# Altium PCB IMU_Board.PcbDoc
Units mm, origin at the board's own origin, x right, y up, seen from the top; angles counter-clockwise.
Board outline 50 x 50 mm, 2 copper layers (Top Layer, Bottom Layer); 25 components, 37 nets, 125 pads, 48 vias.
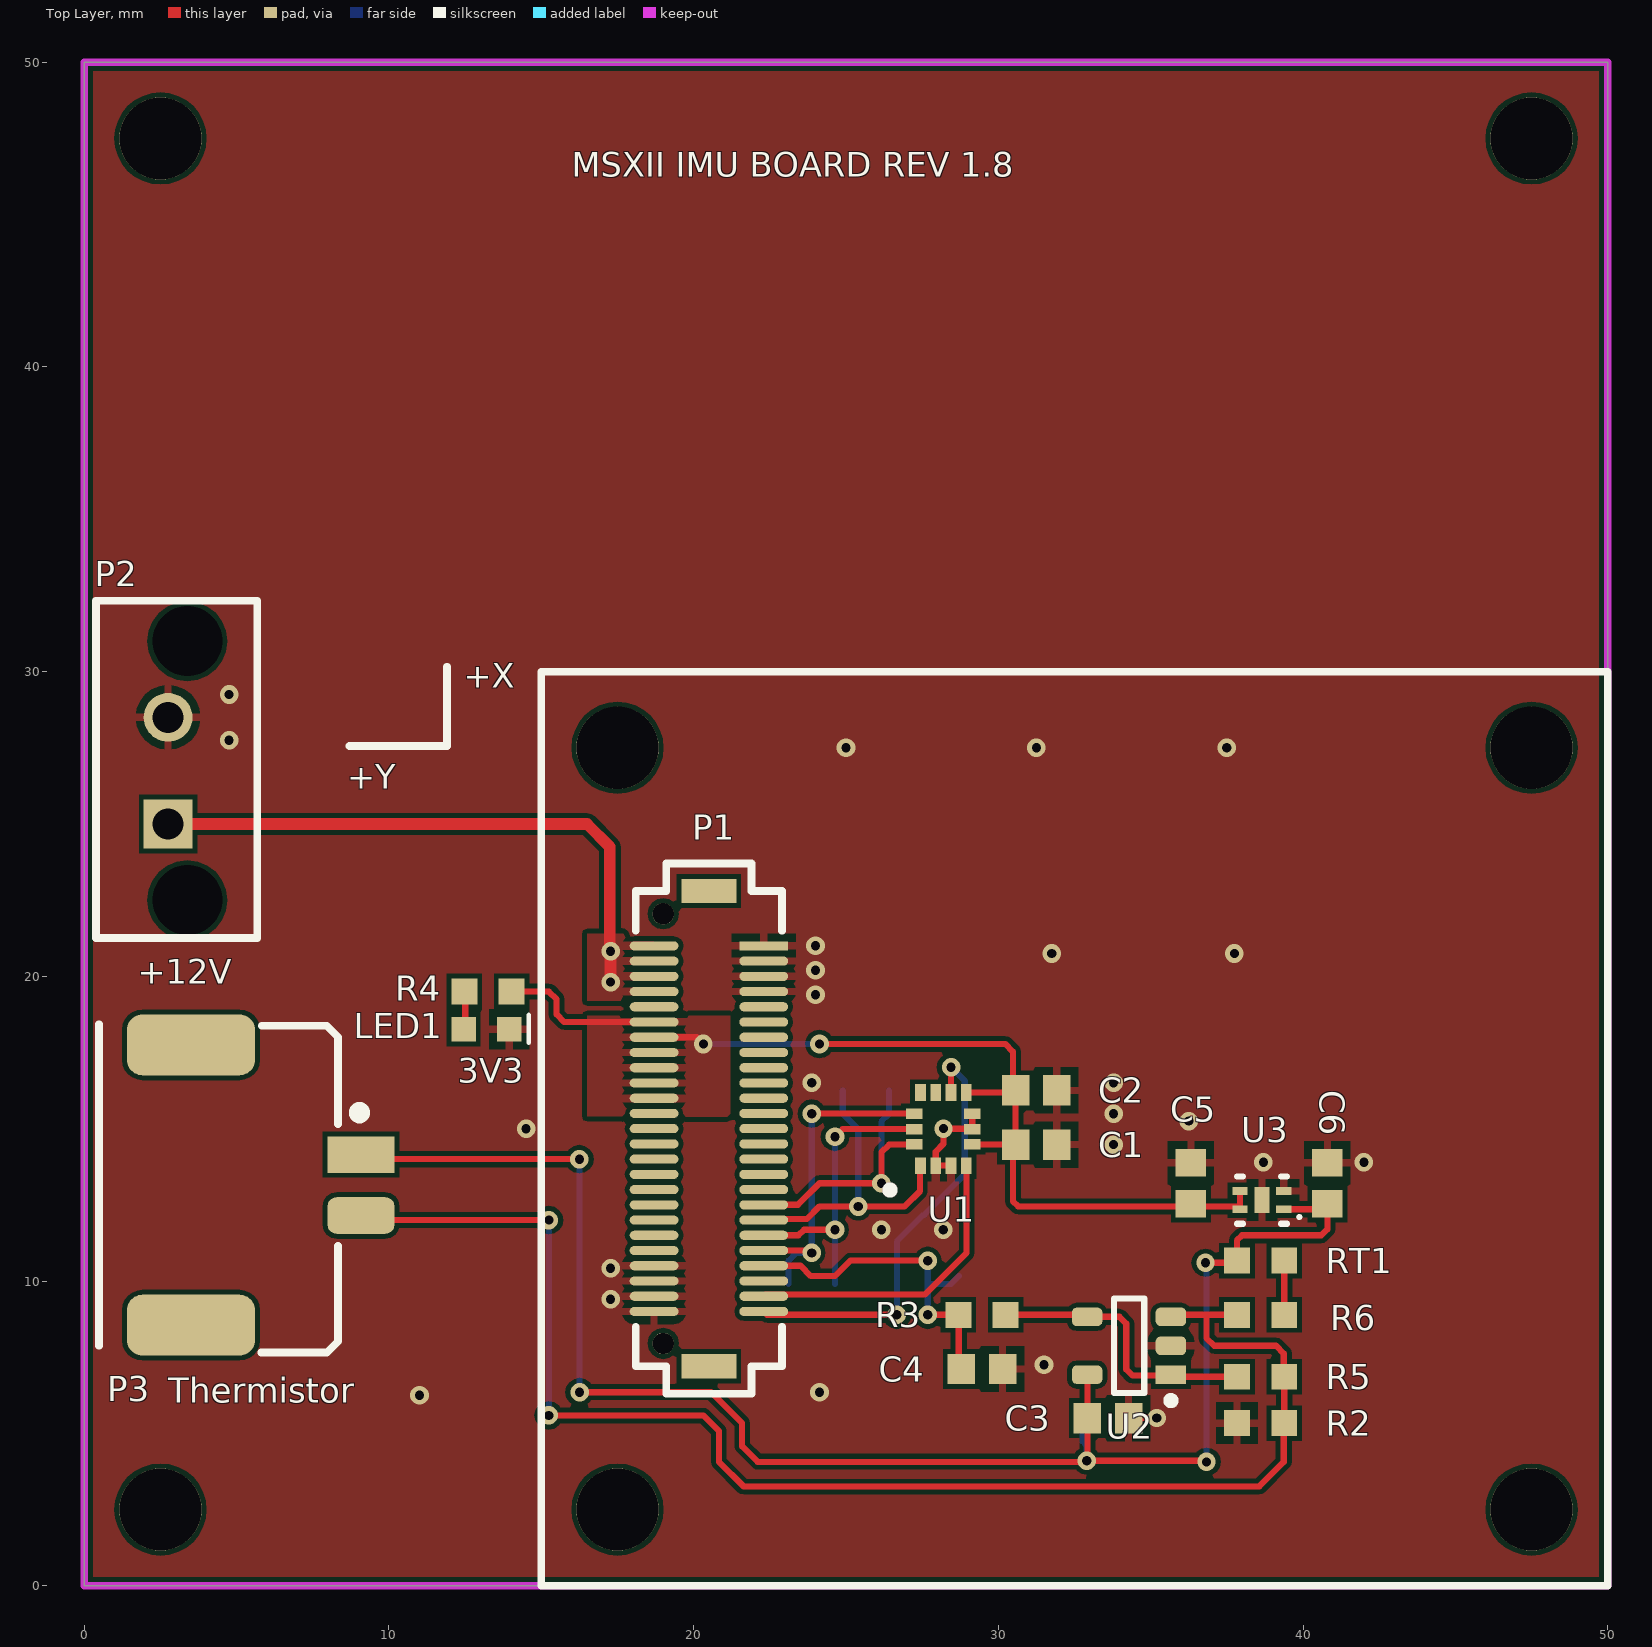
[diagram p0: Top Layer view]
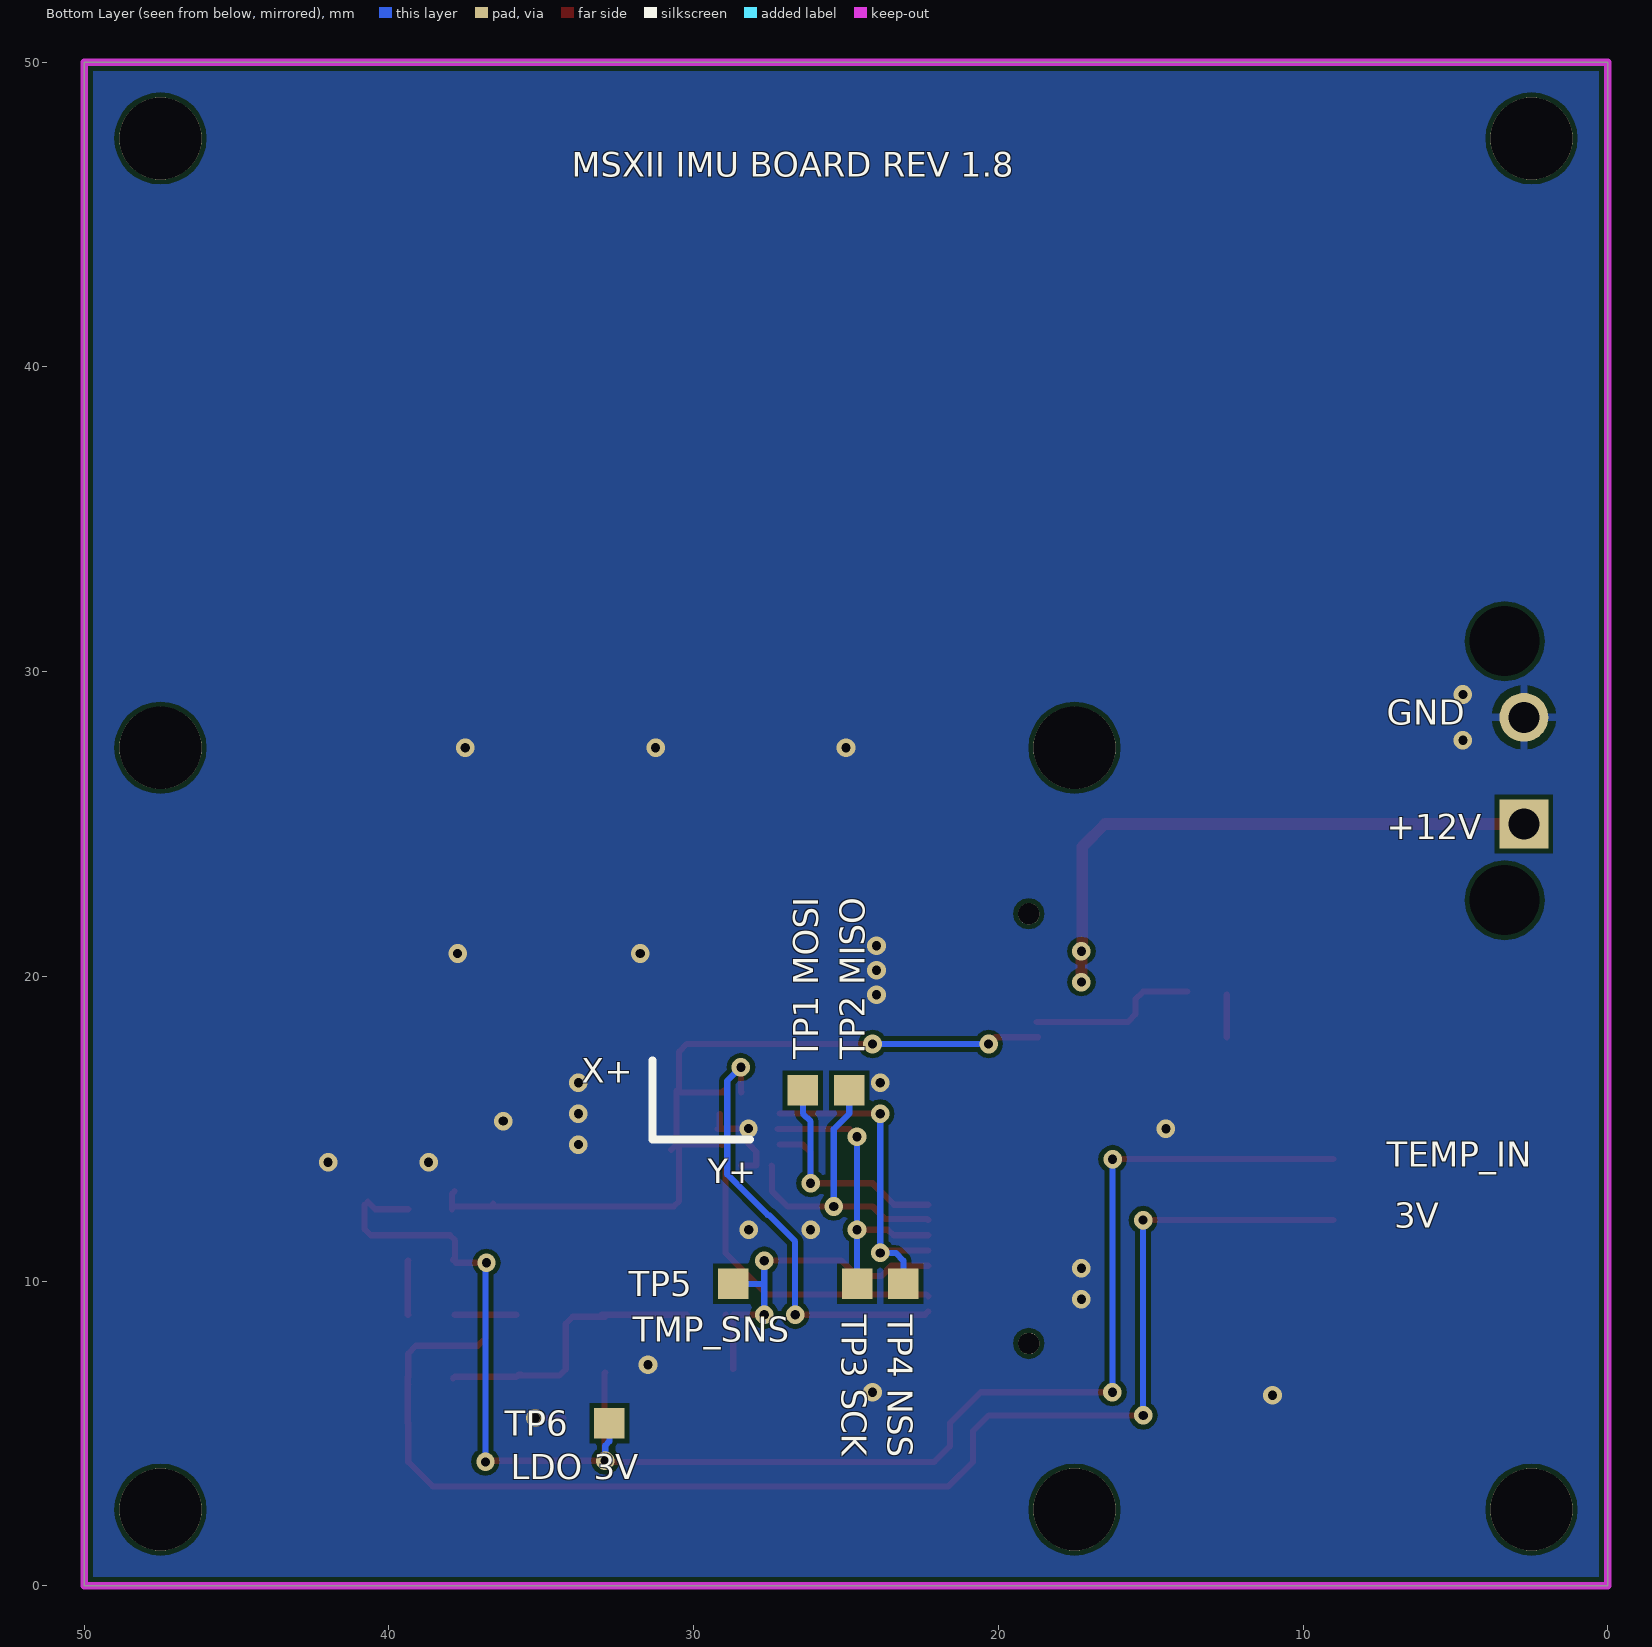
[diagram p1: Bottom Layer view, seen from below]
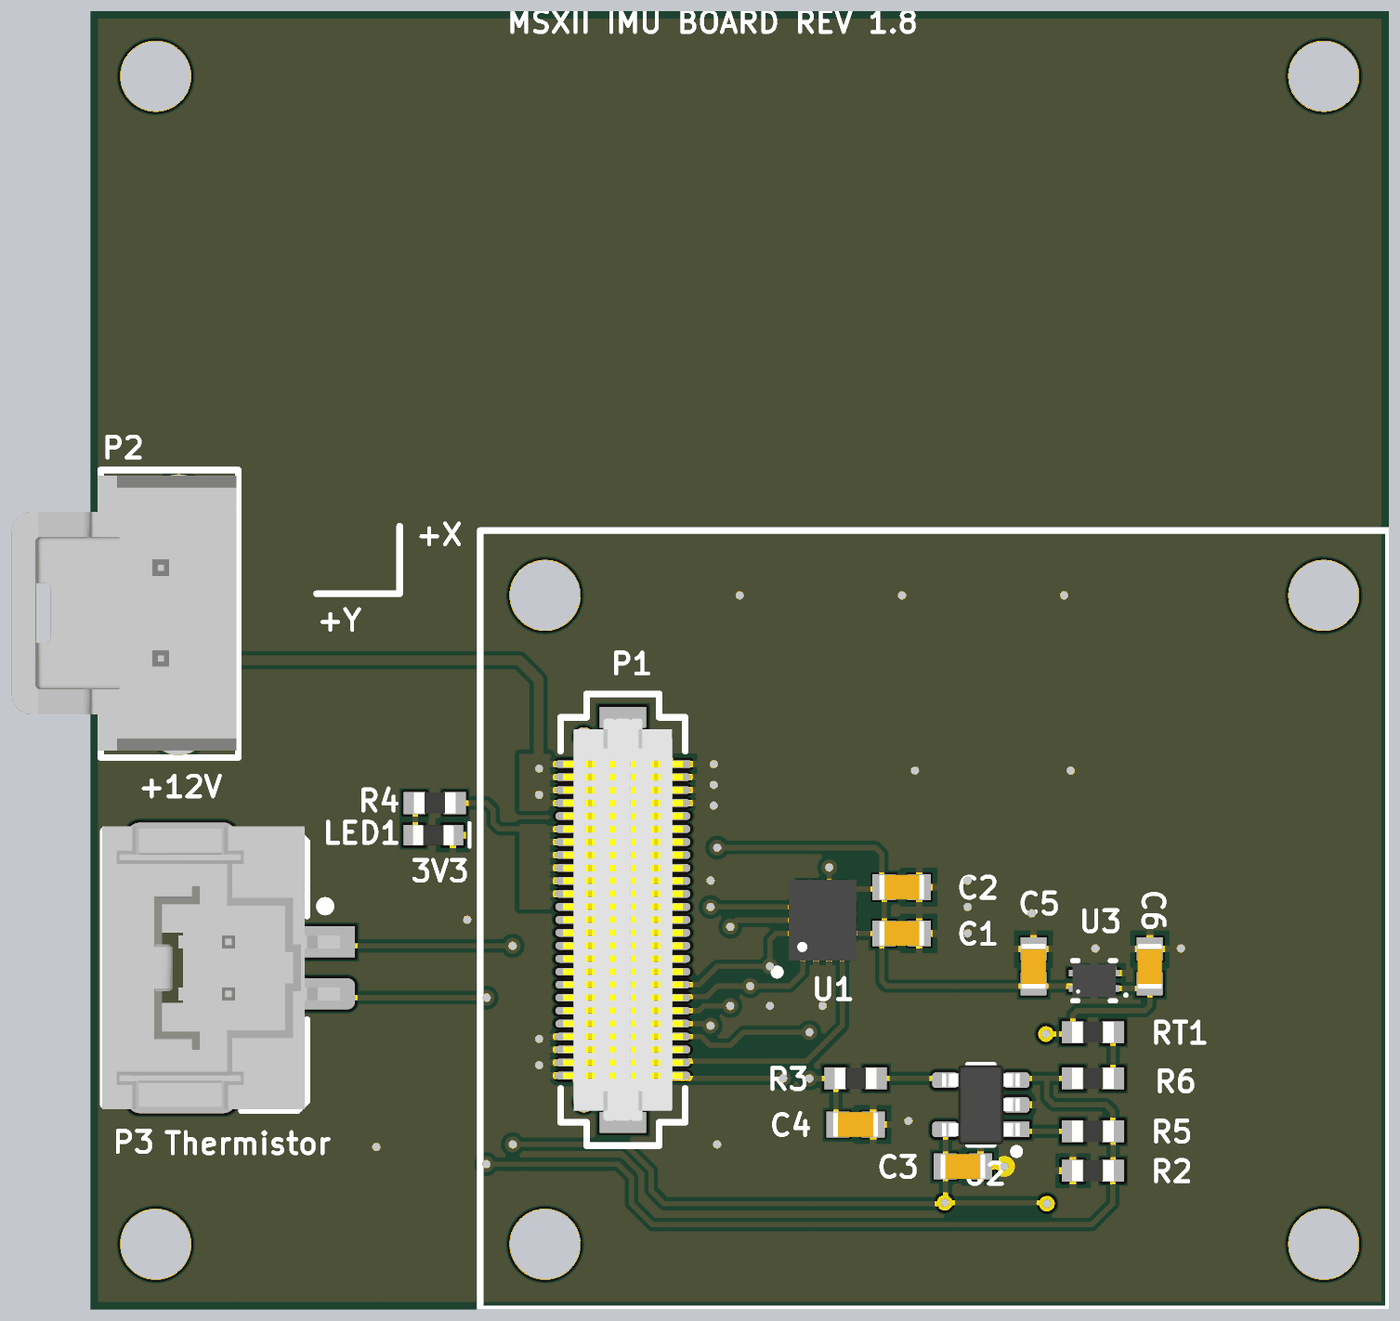
[diagram p2: 3D render of the assembled board from above, using the file's embedded part models]

## Layer stack, top to bottom
Top Solder: solder mask 0.0102, Solder Resist, Dk 3.5
Top Layer: signal copper 0.0356
Dielectric 1: dielectric 0.32, FR-4, Dk 4.8
Bottom Layer: signal copper 0.0356
Bottom Solder: solder mask 0.0102, Solder Resist, Dk 3.5

## Board outline
0,0 0,50 50,50 50,0

## Design rules (kind name [scope] priority, off if disabled: settings)
Clearance [All] p1: gap=0.152 ignorepadtopadclearanceinfootprint=TRUE except(0: Arc-Hole Track-Hole SMDPad-Hole THPad-Hole Via-Hole Fill-Hole Poly-Hole Region-Hole Text-Hole)
ComponentClearance ComponentClearance_ControllerBoard [InComponent('P1') vs Identifier = 'Controller-Board'] p1: gap=0 collisioncheckmode=3 verticalgap=0 showdistances=FALSE
ComponentClearance ComponentClearance_Standoffs [Identifier = 'Standoff' vs Identifier = 'Controller-Board'] p2: gap=0 collisioncheckmode=3 verticalgap=0 showdistances=FALSE
ComponentClearance [All] p3: gap=0.254 collisioncheckmode=3 verticalgap=0.254 showdistances=FALSE
HoleSize [All] p1: absolutevalues=TRUE maxlimit=6.3 minlimit=0.3 maxpercent=80.000 minpercent=20.000
MinimumAnnularRing [All] p1: minimumring=0.152
MinimumSolderMaskSliver [All] p1: minsoldermaskwidth=0.3
PolygonConnect [IsPad] p1: connectstyle=Relief reliefconductorwidth=0.254 reliefentries=4 polygonreliefangle="90 Angle" airgapwidth=0.254
PolygonConnect PolygonConnect_NoThermal [Not(IsPad)] p2: connectstyle=Direct reliefconductorwidth=0.254 reliefentries=4 polygonreliefangle="90 Angle" airgapwidth=0.254
RoutingVias [All] p1: holewidth=0.3 width=0.6 viastyle="Through Hole" minholewidth=0.3 minwidth=0.6 maxholewidth=0.711 maxwidth=1.27
SilkToSolderMaskClearance [IsPad] p1: minsilkscreentomaskgap=0.178 clearancetoexposedcopper=TRUE
SolderMaskExpansion [All] p1: expansion=0.102
Width [All] p1: maxlimit=2.54 minlimit=0.152 preferedwidth=0.203
26 further rules are at their usual default settings.

## Classes and differential pairs
component class Controller_Board_Interface: P1

## Components (designator, comment, footprint, x,y, rotation, side; value= is the part's Value field where it differs from the comment)
C1 "CAP CER 0.1UF 50V 10% X7R 0603" "CAP, 0603" 31.242,14.478 r0 top
C2 "CAP CER 0.1UF 50V 10% X7R 0603" "CAP, 0603" 31.242,16.256 r0 top
C3 "CAP CER 0.1UF 50V 10% X7R 0603" "CAP, 0603" 33.6,5.5 r0 top
C4 "CAP CER 10nF 50V 5% X7R 0603" "CAP, 0603" 29.464,7.112 r0 top
C5 "CAP CER 1UF 50V 10% X7R 0603" "CAP, 0603" 36.322,13.208 r90 top
C6 "CAP CER 1UF 50V 10% X7R 0603" "CAP, 0603" 40.8,13.208 r90 top
LED1 "LED GREEN CLEAR 2V 0603" LED_0603 12.5,18.25 r0 top
P1 "CONN 50POS Bergstak Plug 0.02\"" "CONN, BERGSTAK 50 POS PLUG" 20.5,15 r0 top locked
P2 "CONN 2POS ULTRA-FIT 0.138\"" "CONN, 2POS ULTRA-FIT" 2.75,25 r90 top
P3 "Dura-Clik" "CONN, 2POS Dura-Click Vertical" 9.08,14.15 r270 top
R2 "RES 10K OHM 1% 1/10W 0603" "RES, 0603" 38.608,5.334 r0 top
R3 "RES 0.0 OHM 1/4W 0603" "RES, 0603" 29.464,8.89 r180 top
R4 "RES 604 OHM 1% 1/10W 0603" "RES, 0603" 13.25,19.5 r180 top
R5 "RES 0.0 OHM 1/4W 0603" "RES, 0603" 38.608,6.858 r180 top
R6 "RES 0.0 OHM 1/4W 0603" "RES, 0603" 38.608,8.89 r180 top
RT1 "NTC THERMISTORS 10KOHM 1608 SMD" "RES, 0603" 38.608,10.668 r180 top
"TP1 MOSI" "Test Point" "Test Point" 26.416,16.256 r90 bottom (schematic designator TP1)
"TP2 MISO" "Test Point" "Test Point" 24.892,16.256 r90 bottom (schematic designator TP2)
"TP3 SCK" "Test Point" "Test Point" 24.638,9.906 r90 bottom (schematic designator TP3)
"TP4 NSS" "Test Point" "Test Point" 23.114,9.906 r90 bottom (schematic designator TP4)
TP5 "Test Point" "Test Point" 28.702,9.906 r90 bottom
TP6 "Test Point" "Test Point" 32.766,5.334 r0 bottom
U1 "IC SENSOR IMU LGA-14L" "IC SENSOR IMU LGA-14L" 28.194,14.986 r90 top
U2 "IC OP AMP GEN PURPOSE RR 10MHZ SOT-23-5" "IC OP AMP GP RR 10MHZ SOT-23-5" 34.29,7.874 r180 top
U3 "IC REG LDO 3V 0.2A 4-TDFN" "IC REG LDO 3V 0.2A 4-TDFN" 39.37,12.354 r90 top

## Footprints (in the part's own frame and the unit in brackets; to place one, negate y for a bottom-side part, rotate by r counter-clockwise, add the part's x,y. Pads: shape width x height; smd on the part's side, far side on the other; paste and mask are expansions set on the pad)
"CAP, 0603" [mm] "Chip Capacitor, 2-Leads, Body 1.60x0.81mm, IPC Medium Density"
  rect 0.9x1 smd mask+0.076: 1(-0.675,0) 2(0.675,0)
  body extent -0.87,-0.48 0.87,0.48, height 0.9
"CONN, 2POS Dura-Click Vertical" [mm] "WM7169CT-ND"
  rect 1.2x2.2 smd: 1(0,0)
  rrect50% 1.2x2.2 smd: 2(2,0)
  rrect50% 2x4.2 smd: 3(-3.6,-5.58) 3(5.6,-5.58)
  silkscreen extent -4.28,-8.6 6.5,0.05, body extent -4.45,-8.63 6.45,0.52, height 8
"CONN, 2POS ULTRA-FIT" [mm] "2 Positions Header, Shrouded Connector 0.138\" (3.50mm) Through Hole Gold"
  rect 1.6x1.6 hole 1.02: 1(0,0)
  round 1.6 hole 1.02: 2(3.5,0)
  round 1.6 hole 2.3: ""(-2.5,-0.63) ""(6,-0.63)
  silkscreen extent -3.74,-2.93 7.33,2.37, body extent -3.48,-2.87 7.12,5.79, height 13.85
"CONN, BERGSTAK 50 POS PLUG" [mm] "Bergstak 50 Position Plug"
  rect 1.6x0.3 smd: 1(1.8,6)
  oval 1.6x0.3 smd: 2(1.8,5.5) 3(1.8,5) 4(1.8,4.5) 5(1.8,4) 6(1.8,3.5) 7(1.8,3) 8(1.8,2.5) 9(1.8,2) 10(1.8,1.5) 11(1.8,1) 12(1.8,0.5) 13(1.8,0) 14(1.8,-0.5) 15(1.8,-1) 16(1.8,-1.5) 17(1.8,-2) 18(1.8,-2.5) 19(1.8,-3) 20(1.8,-3.5) 21(1.8,-4) 22(1.8,-4.5) 23(1.8,-5) 24(1.8,-5.5) 25(1.8,-6) 26(-1.8,-6) 27(-1.8,-5.5) 28(-1.8,-5) 29(-1.8,-4.5) 30(-1.8,-4) 31(-1.8,-3.5) 32(-1.8,-3) 33(-1.8,-2.5) 34(-1.8,-2) 35(-1.8,-1.5) 36(-1.8,-1) 37(-1.8,-0.5) 38(-1.8,0) 39(-1.8,0.5) 40(-1.8,1) 41(-1.8,1.5) 42(-1.8,2) 43(-1.8,2.5) 44(-1.8,3) 45(-1.8,3.5) 46(-1.8,4) 47(-1.8,4.5) 48(-1.8,5) 49(-1.8,5.5) 50(-1.8,6)
  round 0.7 hole 0.7: ""(-1.5,-7.05) ""(-1.5,7.05)
  rect 1.8x0.8 smd: ""(0,-7.8) ""(0,7.8)
  silkscreen extent -2.4,-8.7 2.4,8.7, body extent -2.3,-7.75 2.3,7.75, height 4.2
"IC OP AMP GP RR 10MHZ SOT-23-5" [mm] "SOT23, 5-Leads, Body 2.90x2.80mm, Pitch 0.95mm, IPC Medium Density"
  rect 1x0.6 smd: 1(-1.375,0.95)
  rrect50% 1x0.6 smd: 2(-1.375,0) 3(-1.375,-0.95) 4(1.375,-0.95) 5(1.375,0.95)
  silkscreen extent -1.5,-1.55 0.5,1.92, body extent -1.5,-1.53 1.5,1.53, height 1.45
"IC REG LDO 3V 0.2A 4-TDFN" [mm] "QFN, 4-Leads, Body 1.20x1.60mm, Pitch 0.50mm/1.40mm, Thermal Pad 0.86x0.50mm, IPC Medium Density"
  rect 0.25x0.5 smd: 1(0,0) 2(0.6,0) 3(0.6,1.44) 4(0,1.44)
  rect 0.86x0.5 smd: 5(0.3,0.715)
  silkscreen extent -0.48,-0.56 1.07,1.54, body extent -0.33,-0.11 0.92,1.54, height 0.6
"IC SENSOR IMU LGA-14L" [mm] "PQFN, 14-Leads, Body 3.00x2.50mm, Pitch 0.50mm, IPC Medium Density"
  rect 0.55x0.35 smd: 1(-1.2,0.75) 2(-1.2,0.25) 3(-1.2,-0.25) 4(-1.2,-0.75) 8(1.2,-0.75) 9(1.2,-0.25) 10(1.2,0.25) 11(1.2,0.75)
  rect 0.35x0.55 smd: 5(-0.5,-0.95) 6(0,-0.95) 7(0.5,-0.95) 12(0.5,0.95) 13(0,0.95) 14(-0.5,0.95)
  silkscreen extent -2.12,1.63 -1.88,1.87, body extent -1.55,-1.3 1.55,1.3, height 0.86
LED_0603 [mm]
  rect 0.8x0.8 smd: 1(-0.05,0.01) 2(1.45,0.01)
  silkscreen extent 2.09,-0.43 2.09,0.48, body extent -0.1,-0.39 1.5,0.41, height 0.55
"RES, 0603" [mm] "Chip Resistor, 2-Leads, Body 1.60x0.80mm, IPC Medium Density"
  rect 0.85x0.85 smd: 1(-0.775,0) 2(0.775,0)
  body extent -0.8,-0.4 0.8,0.4, height 0.55
"Test Point" [mm]
  rect 1x1 smd: TP(0,0)

## Part data
C1 C2 C3: "0.10µF ±10% 50V Ceramic Capacitor X7R 0603 (1608 Metric)", Capacitance=0.1µF, Manufacturer 1="AVX Corporation", Manufacturer Part Number 1=06035C104KAT2A, Operating Temperature="-55°C ~ 125°C", Package / Case="0603 (1608 Metric)", Ratings=-, Supplier Part Number 1=478-5052-1-ND, Temperature Coefficient=X7R, Tolerance=±10%, Voltage=50V, ComponentLink1Description=http://datasheets.avx.com/X7RDielectric.pdf, ComponentLink1URL=http://datasheets.avx.com/X7RDielectric.pdf, Height - Seated (Max)=-, Lead Spacing=-, Lead Style=-, Mounting Type="Surface Mount, MLCC", Packaging="Cut Tape (CT)", Part Status=Active, Size / Dimension="0.063\" L x 0.032\" W (1.60mm x 0.81mm)", Supplier 1=Digi-Key, Thickness (Max)="0.035\" (0.90mm)"
C4: "10000pF ±5% 50V Ceramic Capacitor U2J 0603 (1608 Metric)", Capacitance=10000pF, Manufacturer 1=KEMET, Manufacturer Part Number 1=C0603C103J5JAC7867, Operating Temperature="-55°C ~ 125°C", Package / Case="0603 (1608 Metric)", Ratings=-, Supplier Part Number 1=399-13384-1-ND, Temperature Coefficient=U2J, Tolerance=±5%, Voltage=50V, ComponentLink1Description=http://www.kemet.com/docfinder?Partnumber=C0603C103J5JAC7867, ComponentLink1URL=http://www.kemet.com/docfinder?Partnumber=C0603C103J5JAC7867, Failure Rate=-, Height - Seated (Max)=-, Lead Spacing=-, Lead Style=-, Mounting Type="Surface Mount, MLCC", Packaging="Cut Tape (CT)", Part Status=Active, Size / Dimension="0.063\" L x 0.032\" W (1.60mm x 0.80mm)", Supplier 1=Digi-Key, Thickness (Max)="0.034\" (0.87mm)"
C5 C6: "1µF ±10% 50V Ceramic Capacitor X7R 0603 (1608 Metric)", Capacitance=1µF, Manufacturer 1="Taiyo Yuden", Manufacturer Part Number 1=UMK107AB7105KA-T, Operating Temperature="-55°C ~ 125°C", Package / Case="0603 (1608 Metric)", Ratings=-, Supplier Part Number 1=587-3247-1-ND, Tolerance=±10%, Voltage=50V, ComponentLink1Description=http://www.yuden.co.jp/productdata/catalog/en/mlcc_all_e.pdf, ComponentLink1URL=http://www.yuden.co.jp/productdata/catalog/en/mlcc_all_e.pdf, Height - Seated (Max)=-, Lead Spacing=-, Lead Style=-, Mounting Type="Surface Mount, MLCC", Packaging="Cut Tape (CT)", Part Status=Active, Size / Dimension="0.063\" L x 0.031\" W (1.60mm x 0.80mm)", Supplier 1=Digi-Key, Thickness (Max)="0.037\" (0.95mm)"
LED1: "Green 572nm LED Indication - Discrete 2V 0603 (1608 Metric)", Color=Green, Current - Test=20mA, Lens Color=Colorless, Manufacturer="Wurth Electronics Inc.", Manufacturer Part Number=150060VS75000, Millicandela Rating=40mcd, Package / Case="0603 (1608 Metric)", Supplier Device Package=0603, Supplier Part Number 1=732-4980-1-ND, Voltage - Forward (Vf) (Typ)=2V, Category=Optoelectronics, ComponentLink1Description=http://katalog.we-online.de/led/datasheet/150060VS75000.pdf, ComponentLink1URL=http://katalog.we-online.de/led/datasheet/150060VS75000.pdf, Features=-, Height (Max)=0.80mm, Lens Style/Size="Rectangle with Flat Top, 1.10mm x 0.70mm", Lens Transparency=Clear, Mounting Type="Surface Mount", Packaging="Cut Tape (CT)", Part Status=Active, Pricing 1="1=0.21, 100=0.1617, 500=0.13964 (CAD)", RoHS="RoHS Compliant", Size / Dimension="1.60mm L x 0.80mm W", Stock 1=9408, Supplier 1=Digi-Key, Viewing Angle=140°, Wavelength - Dominant=570nm, Wavelength - Peak=572nm
P1: "50 Position Connector Plug, Outer Shroud Contacts Surface Mount Gold", Manufacturer 1="Amphenol FCI", Manufacturer Part Number 1=10132797-055100LF, Supplier Part Number 1=609-5226-1-ND, ComponentLink1Description=http://portal.fciconnect.com/Comergent//fci/drawing/10132797.pdf, ComponentLink1URL=http://portal.fciconnect.com/Comergent//fci/drawing/10132797.pdf, Connector Type="Plug, Outer Shroud Contacts", Contact Finish=Gold, Contact Finish Thickness="1µin (0.025µm)", Height Above Board="0.169\" (4.30mm)", Mated Stacking Heights=5mm, Mounting Type="Surface Mount", Number of Positions=50, Number of Rows=2, Packaging="Cut Tape (CT)", Part Status=Active, Pitch="0.020\" (0.50mm)", Series="BergStak Plug", Supplier 1=Digi-Key
P2: "2 Positions Header, Shrouded Connector 0.138\" (3.50mm) Through Hole Gold", Current Rating=-, Insulation Color=Black, Manufacturer 1="Molex, LLC", Manufacturer Part Number 1=1722861302, Material Flammability Rating="UL94 V-0", Operating Temperature="-40°C ~ 120°C", Supplier Part Number 1=WM11673-ND, Voltage=400V, ComponentLink1Description=http://www.molex.com/pdm_docs/sd/1722861302_sd.pdf, ComponentLink1URL=http://www.molex.com/pdm_docs/sd/1722861302_sd.pdf, Connector Type=Header, Contact Finish - Mating=Gold, Contact Finish - Post=Tin, Contact Finish Thickness - Mating="30µin (0.76µm)", Contact Finish Thickness - Post="60µin (1.52µm)", Contact Length - Mating=-, Contact Length - Post="0.126\" (3.20mm)", Contact Material="Copper Alloy", Contact Shape=Square, Contact Type="Male Pin", Fastening Type="Latch Holder", Ingress Protection=-, Insulation Height="0.465\" (11.80mm)", Insulation Material="Liquid Crystal Polymer (LCP)", Mated Stacking Heights=26.99mm, Mounting Type="Through Hole", Number of Positions=2, Number of Positions Loaded=All, Number of Rows=1, Overall Contact Length=-, Packaging=Tray, Part Status=Active, Pitch - Mating="0.138\" (3.50mm)", Row Spacing - Mating=-, Series=UltraFit, Shrouding="Shrouded - 4 Wall", Style="Board to Board or Cable", Supplier 1=Digi-Key, Termination="Kinked Pin, Solder"
P3: library part "CONN 2POS DURA-CLIK 0.079\" VERT", "2 Positions Header, Shrouded Connector 0.079\" (2.00mm) Surface Mount, Vertical Tin", Current Rating=-, Insulation Color=Natural, Manufacturer="Molex, LLC", Manufacturer Part Number=5600200220, Supplier Part Number 1=WM10862CT-ND, Applications="Automotive, Industrial", Category="Connectors, Interconnects", ComponentLink1Description=http://www.molex.com/pdm_docs/sd/5600200220_sd.pdf, ComponentLink1URL=http://www.molex.com/pdm_docs/sd/5600200220_sd.pdf, Connector Type=Header, Contact Finish - Mating=Tin, Contact Finish - Post=Tin, Contact Finish Thickness - Mating=-, Contact Finish Thickness - Post=-, Contact Length - Mating=-, Contact Length - Post=-, Contact Material="Copper Alloy", Contact Shape=Square, Contact Type="Male Pin", Fastening Type="Latch Lock", Features="Solder Retention", Ingress Protection=-, Insulation Height="0.315\" (8.00mm)", Insulation Material="Polyamide (PA), Nylon", Mated Stacking Heights=9.3mm, Material Flammability Rating=-, Mounting Type="Surface Mount", Number of Positions=2, Number of Positions Loaded=All, Number of Rows=1, Operating Temperature=-, Overall Contact Length=-, Packaging="Cut Tape (CT)", Part Status=Active, Pitch - Mating="0.079\" (2.00mm)", Pricing 1="1=1.16, 10=1.012, 25=0.952, 50=0.9122, 100=0.8727, 250=0.79336 (CAD)", RoHS="RoHS Compliant", Row Spacing - Mating=-, Shrouding="Shrouded - 4 Wall", Stock 1=11912, Style="Board to Cable/Wire", Supplier 1=Digi-Key, Termination=Solder, Voltage Rating=-
R2: "RES SMD 10K OHM 1% 1/10W 0603", Manufacturer 1=Yageo, Manufacturer Part Number 1=RC0603FR-0710KL, Operating Temperature="-55°C ~ 155°C", Package / Case="0603 (1608 Metric)", Power=1/10W, Resistance=10k, Supplier Device Package=0603, Supplier Part Number 1=311-10.0KHRCT-ND, Temperature Coefficient=±100ppm/°C, Tolerance=±1%, ComponentLink1Description=http://www.yageo.com/documents/recent/PYu-RC_Group_51_RoHS_L_7.pdf, ComponentLink1URL=http://www.yageo.com/documents/recent/PYu-RC_Group_51_RoHS_L_7.pdf, Composition="Thick Film", Failure Rate=-, Height - Seated (Max)="0.022\" (0.55mm)", Packaging="Cut Tape (CT)", Part Status=Active, Size / Dimension="0.063\" L x 0.031\" W (1.60mm x 0.80mm)", Supplier 1=Digi-Key
R3 R5 R6: "RES SMD 0.0 OHM JUMPER 1/4W 0603", Manufacturer 1="Vishay Dale", Manufacturer Part Number 1=CRCW06030000Z0EAHP, Operating Temperature="-55°C ~ 155°C", Package / Case="0603 (1608 Metric)", Power (Watts)=1/4W, Resistance=0.0, Supplier Device Package=0603, Supplier Part Number 1=541-0.0SBCT-ND, ComponentLink1Description=http://www.vishay.com/docs/20043/crcwhpe3.pdf, ComponentLink1URL=http://www.vishay.com/docs/20043/crcwhpe3.pdf, Composition="Thick Film", Failure Rate=-, Height - Seated (Max)="0.022\" (0.55mm)", Packaging="Cut Tape (CT)", Part Status=Active, Size / Dimension="0.063\" L x 0.033\" W (1.60mm x 0.85mm)", Supplier 1=Digi-Key
R4: "RES SMD 604 OHM 1% 1/10W 0603", Manufacturer 1=Yageo, Manufacturer Part Number 1=RC0603FR-07604RL, Operating Temperature="-55°C ~ 155°C", Package / Case="0603 (1608 Metric)", Power=1/10W, Resistance=604, Supplier Device Package=0603, Supplier Part Number 1=311-604HRCT-ND, Temperature Coefficient=±100ppm/°C, Tolerance=±1%, ComponentLink1Description=http://www.yageo.com/documents/recent/PYu-RC_Group_51_RoHS_L_7.pdf, ComponentLink1URL=http://www.yageo.com/documents/recent/PYu-RC_Group_51_RoHS_L_7.pdf, Composition="Thick Film", Failure Rate=-, Height - Seated (Max)="0.022\" (0.55mm)", Packaging="Cut Tape (CT)", Part Status=Active, Size / Dimension="0.063\" L x 0.031\" W (1.60mm x 0.80mm)", Supplier 1=Digi-Key
RT1: B Value Tolerance=±1%, Manufacturer="Murata Electronics North America", Manufacturer Part Number=NCU18XH103F60RB, Operating Temperature="-40°C ~ 125°C", Package / Case="0603 (1608 Metric)", Resistance=10K, B0/50=-, B25/50=3380K, B25/75=-, B25/85=3434K, B25/100=3455K, Category="Sensors, Transducers", ComponentLink1Description=https://www.murata.com/~/media/webrenewal/support/library/catalog/products/thermistor/r03e.ashx, ComponentLink1URL=https://www.murata.com/~/media/webrenewal/support/library/catalog/products/thermistor/r03e.ashx, Length - Lead Wire=-, Mounting Type="Surface Mount", Packaging="Tape & Reel (TR)", Part Status=Active, Pricing 1="4000=0.06734, 8000=0.05942, 12000=0.05744, 20000=0.05645, 28000=0.05546 (CAD)", RoHS="Request Inventory Verification", Stock 1=4000, Supplier 1=Digi-Key
U1: "Accelerometer, Gyroscope, 3 Axis Sensor I²C, SPI Output", Manufacturer=STMicroelectronics, Manufacturer Part Number=LSM6DS3USTR, Operating Temperature="-40°C ~ 85°C (TA)", Supplier Part Number 1=497-16910-1-ND, Category="Sensors, Transducers", ComponentLink1Description=http://www.st.com/content/ccc/resource/technical/document/datasheet/group0/2e/84/27/34/60/8d/49/f2/DM00237513/files/DM00237513.pdf/jcr:content/translations/en.DM00237513.pdf, ComponentLink1URL=http://www.st.com/content/ccc/resource/technical/document/datasheet/group0/2e/84/27/34/60/8d/49/f2/DM00237513/files/DM00237513.pdf/jcr:content/translations/en.DM00237513.pdf, Output Type="I²C, SPI", Part Status=Active, Pricing 1="1=4.3, 10=3.858, 100=3.1606, 500=2.69052, 1000=2.26912 (CAD)", RoHS="RoHS Compliant", Sensor Type="Accelerometer, Gyroscope, 3 Axis", Stock 1=23614, Supplier 1=Digi-Key
U2: "General Purpose Amplifier 1 Circuit Rail-to-Rail SOT-23-5", Current - Output / Channel=50mA, Current - Supply=400µA, Manufacturer 1="Texas Instruments", Manufacturer Part Number 1=TLV316QDBVRQ1, Operating Temperature="-40°C ~ 125°C", Package / Case="SC-74A, SOT-753", Supplier Device Package=SOT-23-5, Supplier Part Number 1=296-45323-1-ND, Voltage - Supply, Single/Dual (±)="1.8 V ~ 5.5 V, ±0.9 V ~ 2.75 V", -3db Bandwidth=-, Amplifier Type="General Purpose", Category="Integrated Circuits (ICs)", ComponentLink1Description=http://www.ti.com/lit/ds/symlink/tlv316-q1.pdf, ComponentLink1URL=http://www.ti.com/lit/ds/symlink/tlv316-q1.pdf, Description 1="IC OP AMP GP RR 10MHZ 5-SOT-23", Mounting Type="Surface Mount", Number of Circuits=1, Output Type=Rail-to-Rail, Packaging="Cut Tape (CT)", Part Status=Active, Pricing 1="1=1.33, 10=1.185, 100=0.9234, 500=0.76276, 1000=0.60218 (CAD)", RoHS="RoHS Compliant", Slew Rate="6 V/µs", Stock 1=1747, Supplier 1=Digi-Key
U3: Current - Limit (Min)=250mA, Current - Output=200mA, Manufacturer="Microchip Technology", Manufacturer Part Number=MIC94310-PYMT-TR, Operating Temperature="-40°C ~ 125°C", Package / Case="4-UFDFN Exposed Pad", Supplier Device Package="4-TDFN (1.2x1.6)", Voltage - Dropout (Typical)="0.04V @ 200mA", Voltage - Input="Up to 3.6V", Voltage - Output=3V, Category="Integrated Circuits (ICs)", ComponentLink1Description=http://www.microchip.com/mymicrochip/filehandler.aspx?ddocname=en580409, ComponentLink1URL=http://www.microchip.com/mymicrochip/filehandler.aspx?ddocname=en580409, Mounting Type="Surface Mount", Packaging="Cut Tape (CT)", Part Status=Active, Pricing 1="1=0.45, 25=0.3708, 100=0.3386 (CAD)", Regulator Topology="Positive Fixed", RoHS="RoHS Compliant", Stock 1=4802, Supplier 1=Digi-Key

## Free pads (board coordinates)
  round 2.7 hole 2.7: ""(2.5,2.5) ""(2.5,47.5) ""(17.5,2.5) ""(17.5,27.5) ""(47.5,2.5) ""(47.5,27.5) ""(47.5,47.5)

## Via types
v1: diameter 0.61, hole 0.305, Top Layer to Bottom Layer, tented both sides, 43 vias
v2: diameter 0.6, hole 0.3, Top Layer to Bottom Layer, 5 vias

## Nets (pads, with @x,y where several pads share a name; then routed paths per layer and width w, separated by ;. In a path a pad name is that pad's centre, name@x,y a point inside that pad or via, vN(x,y) a via of type N, cw(c..) or ccw(c..) an arc to the next point about the centre after c; other vN are vias at no path point)
3V3: C1.1 C2.1 C5.1 P1.40 P1.41 P1.42 P1.43 P1.44 P1.45 R4.1 U1.5 U1.8 U3.3 U3.4 | length 33.9
  Top Layer w0.203: R4.1@13.8,19.5 R4.1 15.25,19.5 15.5,19.25 15.5,18.75 15.75,18.5 P1.45@18.75,18.5 ; P1.44 20.1,18 v1(20.32,17.78) ; v1(24.13,17.78) 30.226,17.78 30.48,17.526 30.48,16.256 30.41,16.186 U1.8 U1.8@29.007,16.249 ; U1.5@29.05,14.5 U1.5@29.075,14.475 ; U1.5@29.21,14.478 30.48,14.478 30.567,14.565 C2.1 ; C1.1@30.734,14.311 C1.1 30.48,14.391 30.48,12.62 30.654,12.446 C5.1@36.576,12.446 ; C5.1@36.576,12.533 36.663,12.446 U3.4@37.846,12.446 ; U3.3@37.846,12.954 37.93,12.87 U3.4
  Bottom Layer w0.203: v1(20.32,17.78) v1(24.13,17.78)
+12V: P1.47 P1.48 P1.49 P1.50 P2.1 | length 19.4
  Top Layer w0.203: v1@17.25,19.75 17.272,19.772 v1(17.272,19.812)
  Top Layer w0.381: P2.1 16.5,25 17.25,24.25 v1@17.25,20.75 ; v1(17.272,19.812) v1(17.272,20.828)
GND: C1.2 C2.2 C3.2 C4.2 C5.2 C6.2 LED1.2 P1.1 P1.2 P1.3 P1.4 P1.26 P1.27 P1.28 P1.29 P2.2 R2.1 U1.2 U1.3 U1.6 U1.7 U2.2 U3.2 U3.5 | length 4.2
  Top Layer w0.203: U1.2 27.944,14.244 28.2,14.5 v2(28.2,15) 29.1,15 29.144,15.044 U1.7 ; U1.2@28,13.8 28.014,13.786 U1.3 ; U1.6 U1.6@29.21,14.986 ; C3.2 v2(35.2,5.5)
  other v1: 11,6.25 24.13,6.35 31.5,7.25 17.272,9.398 17.272,10.414 26.162,11.684 28.194,11.684 38.7,13.9 42,13.9 33.782,14.478 14.5,15 36.25,15.25 33.782,15.494 23.876,16.51 33.782,16.51 24,19.4 24,20.2 31.75,20.75 37.75,20.75 24,21 25,27.5 31.25,27.5 37.5,27.5 4.75,27.75 4.75,29.25
LDO_3V: C3.1 C6.1 P3.1 RT1.2 TP6.TP U2.5 U3.1 | length 54.9
  Top Layer w0.203: P3.1@9,14 v1(16.25,14) ; v1(16.256,6.35) 20.574,6.35 21.59,5.334 21.59,4.572 22.098,4.064 v2@32.8,4.064 ; v2@32.8,4.1 32.925,4.225 C3.1 32.925,6.975 U2.5@32.9,7 ; v2(32.9,4.1) 36.8,4.1 v2(36.836,4.064) ; v2@36.659,10.741 v2(36.8,10.6) 37.8,10.6 RT1.2@37.9,10.7 ; RT1.2 37.833,11.333 38,11.5 40.6,11.5 40.8,11.7 C6.1@40.8,12.5 ; U3.1 40.454,12.354 C6.1@40.7,12.6
  Bottom Layer w0.203: v1(16.25,14) 16.25,6.356 v1(16.256,6.35) ; TP6.TP 32.766,4.734 32.9,4.6 v2(32.9,4.1) ; v2(36.8,10.6) 36.836,10.564 v2(36.836,4.064)
NetLED1_1: LED1.1 R4.2 | length 1.4
  Top Layer w0.203: LED1.1@12.5,18 R4.2@12.5,19.4
NetP3_2: P3.2 R2.2 R5.1 R6.2 U2.3 | length 47.8
  Top Layer w0.203: P3.2@9,12 v1(15.25,12) ; v1(15.24,5.588) 20.32,5.588 20.828,5.08 20.828,4.064 21.636,3.256 38.562,3.256 39.37,4.064 39.37,5.334 39.383,5.347 R5.1@39.383,6.591 ; U2.3@35.814,8.89 36.83,8.89 ; R6.2@37.846,8.89 R6.2 36.83,8.89 ; R5.1@39.37,6.604 R5.1@39.383,6.591 ; R5.1@39.37,6.858 39.37,7.62 39.116,7.874 37.084,7.874 36.83,8.128 36.83,8.89 ; R5.1 R5.1@39.383,6.591
  Bottom Layer w0.203: v1(15.24,5.588) 15.25,5.598 v1(15.25,12)
NetR3_1: R3.1 R5.2 U2.1 U2.4 | length 9.4
  Top Layer w0.203: R3.1@30.226,8.89 R3.1 U2.4@33.02,8.89 ; U2.4 33.976,8.824 34.2,8.6 34.2,7.1 34.4,6.9 U2.1@35.7,6.9 ; U2.1 U2.1@35.748,6.924 ; U2.1@35.814,6.858 R5.2 37.842,6.858 R5.2@37.9,6.8
NetR6_1: R6.1 RT1.1 | length 1.8
  Top Layer w0.203: R6.1@39.37,8.89 R6.1@39.383,8.903 ; RT1.1@39.37,10.668 39.383,10.655 R6.1@39.383,8.903 ; R6.1 R6.1@39.383,8.903
PA0/IMU_INT2: P1.25 U1.9 | length 14.4
  Top Layer w0.203: P1.25 22.41,8.89 v1(26.67,8.89) ; U1.9@28.436,16.194 U1.9 ; U1.9@28.448,16.256 v1(28.448,17.018)
  Bottom Layer w0.203: v1(26.67,8.89) 26.67,11.297 27.541,12.169 27.569,12.169 28.9,13.5 28.9,16.566 v1(28.448,17.018)
PA1/IMU_INT1: P1.24 U1.4 | length 10.1
  Top Layer w0.203: P1.24 22.354,9.554 27.588,9.554 28.956,10.922 28.956,13.774 U1.4
PA2/AN2/USART2_TX_1: P1.23
PA3/AN3/IMU_TEMP_SENSE: C4.1 P1.22 R3.2 TP5.TP | length 11.4
  Top Layer w0.203: P1.22 23.508,10.5 23.848,10.16 24.638,10.16 25.146,10.668 v1(27.686,10.668) ; v1(27.686,8.89) R3.2 28.702,8.89 C4.1@28.702,7.112 ; R3.2@28.943,8.89 R3.2@28.956,8.89
  Bottom Layer w0.203: v1(27.686,8.89) 27.686,9.906 ; v1(27.686,10.668) 27.686,9.906 ; TP5.TP@28.702,10.16 28.448,9.906 27.686,9.906
PA4/IMU_SPI1_NSS: "TP4 NSS.TP" P1.21 U1.12 | length 11.1
  Top Layer w0.203: P1.21 23.798,11 v1(23.876,10.922) ; v1(23.876,15.494) U1.12@27.178,15.494
  Bottom Layer w0.203: 23.114,9.906 23.114,10.668 23.368,10.922 v1(23.876,10.922) v1(23.876,15.494)
PA5/IMU_SPI1_SCK: "TP3 SCK.TP" P1.20 U1.13 | length 10
  Top Layer w0.203: P1.20 23.438,11.5 23.622,11.684 v1(24.638,11.684) ; v1(24.638,14.732) 24.892,14.986 U1.13
  Bottom Layer w0.203: 24.638,9.906 v1(24.638,11.684) v1(24.638,14.732)
PA6/IMU_SPI1_MISO: "TP2 MISO.TP" P1.19 U1.1 | length 10.3
  Top Layer w0.203: P1.19 22.339,12.039 23.723,12.039 24.13,12.446 v1(25.4,12.446) 26.924,12.446 27.432,12.954 U1.1@27.432,13.716 ; U1.1@27.432,13.774 U1.1
  Bottom Layer w0.203: 24.892,16.256 24.892,15.494 25.4,14.986 v1(25.4,12.446)
PA7/IMU_SPI1_MOSI: "TP1 MOSI.TP" P1.18 U1.14 | length 9.4
  Top Layer w0.203: P1.18 23.422,12.5 24.13,13.208 v1(26.162,13.208) 26.162,14.224 26.416,14.478 U1.14@27.178,14.478
  Bottom Layer w0.203: v1(26.162,13.208) 26.162,15.24 26.416,15.494 26.416,16.256
PA8_1: P1.7
PA9_1: P1.6
PA10_1: P1.5
PA15/LED_RED_1: P1.39
PB0/AN8_1: P1.17
PB1/AN9_1: P1.16
PB2_1: P1.15
PB3/LED_GREEN_1: P1.38
PB4/LED_BLUE_1: P1.37
PB5/LED_BLUE_1: P1.36
PB6/USART1_TX_1: P1.34
PB7/USART1_RX_1: P1.33
PB8/I2C1_SCL_1: P1.32
PB9/I2C1_SDA_1: P1.31
PB10/USART3_TX/I2C2_SCL_1: P1.14
PB11/USART3_RX/I2C2_SDA_1: P1.13
PB12/SPI2_NSS_1: P1.11
PB13/SPI2_SCK_1: P1.10
PB14/SPI2_MISO_1: P1.9
PB15/SPI2_MOSI_1: P1.8
PC13_1: P1.30
pads on no net: P1. P1.12 P1.35 P1.46 P2. P3.3 U1.10 U1.11

## Polygon pours and split planes (outlines as drawn)
+12V on Top Layer "+12V_L01_P000" (solid, pour order 0): 16.5,21.4 16.5,19.2 20,19.2 20,21.4
3V3 on Top Layer "3V3_L01_P002" (solid, pour order 2): 16.5,18.7 16.5,15.4 21.2,15.396 21.2,18.7
GND on Top Layer "GND_L01_P006" (solid, pour order 6): 0,50 0,0 50,0 50,50
GND on Bottom Layer "GND_L02_P004" (solid, pour order 4): 0,50 0,0 50,0 50,50

## Keep-outs
Keep-Out Layer:
  the board outline again, w0.254

## Silkscreen, mask and mechanical layers (free items; w line width, h text height)
Top Overlay:
  lines w0.254: 8.7,27.564 11.9,27.564 11.9,30.164 ; 15,0 50,0 50,30 15,30 15,0
  text "MSXII IMU BOARD REV 1.8" at 16,46.25 h0.8
  text "+X" at 12.446,29.464 h0.8
  text "+Y" at 8.636,26.162 h0.8
  text "+12V" at 1.75,19.75 h0.8
  text "3V3" at 12.25,16.5 h0.8
  text "Thermistor" at 2.75,6 h0.81
Bottom Overlay:
  lines w0.254: 28.148,14.646 31.348,14.646 31.348,17.246
  text "MSXII IMU BOARD REV 1.8" at 34,46.25 h0.8
  text "GND" at 7.25,28.25 h0.81
  text "+12V" at 7.25,24.5 h0.81
  text "+X" at 32.004,16.51 h0.8
  text "TEMP_IN" at 7.25,13.75 h0.81
  text "+Y" at 27.94,13.208 h0.8
  text "3V" at 7,11.75 h0.81
  text "TMP_SNS" at 32,8 h0.81
  text "LDO 3V" at 36,3.5 h0.81